# Altium PCB frm-mw-diode-detector.PcbDoc
Units mm, origin at the board's own origin, x right, y up, seen from the top; angles counter-clockwise.
Board outline 28 x 38 mm, 2 copper layers (Top Layer, Bottom Layer), stack 1.569 mm thick; 30 components, 17 nets, 94 pads, 84 vias.
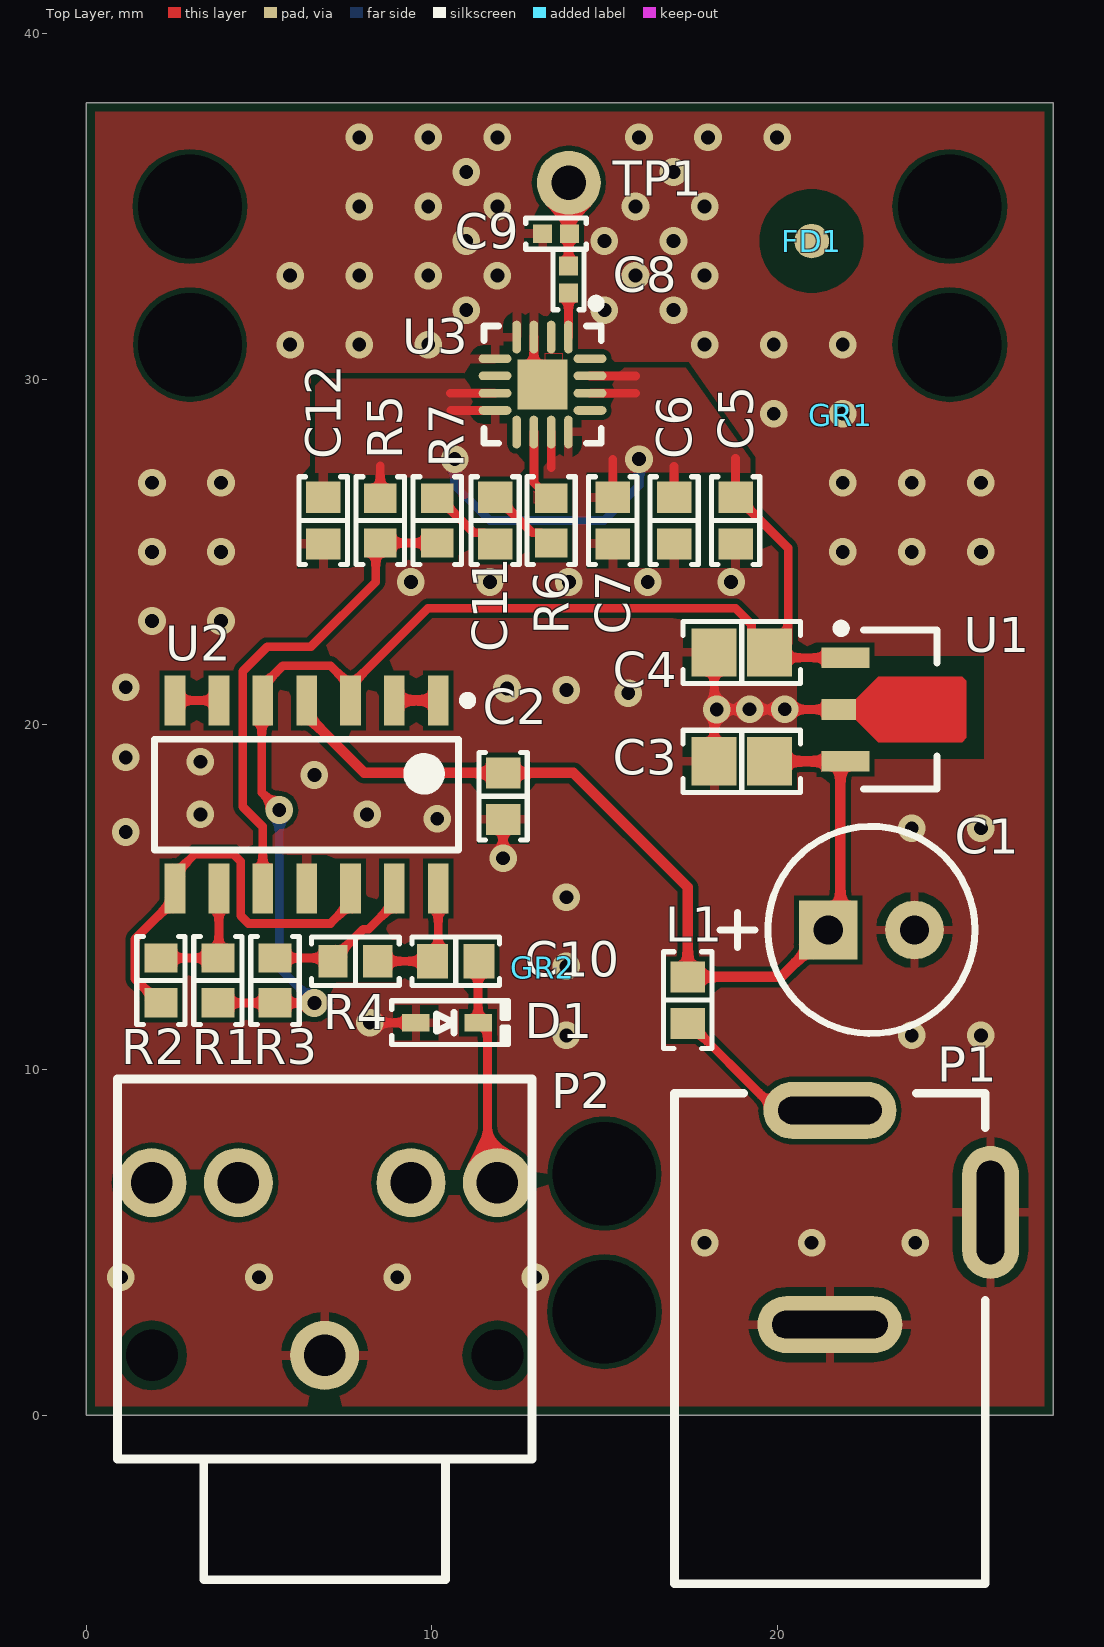
[diagram p0: Top Layer view]
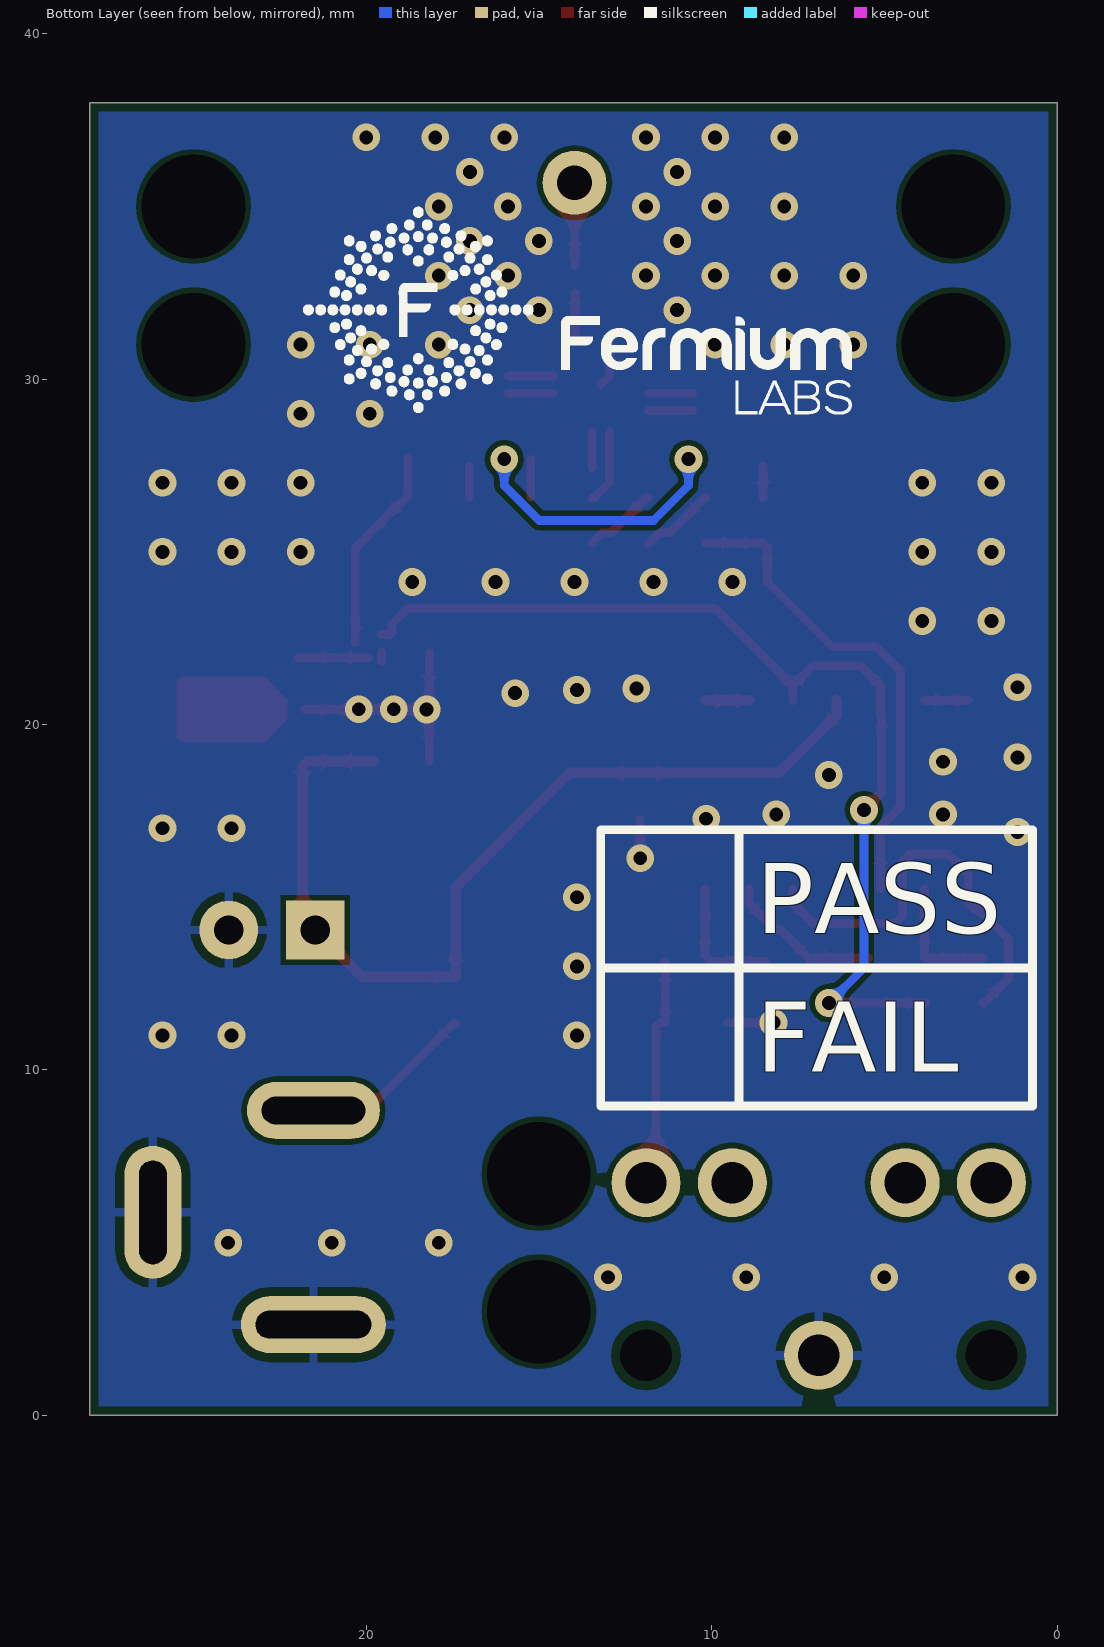
[diagram p1: Bottom Layer view, seen from below]
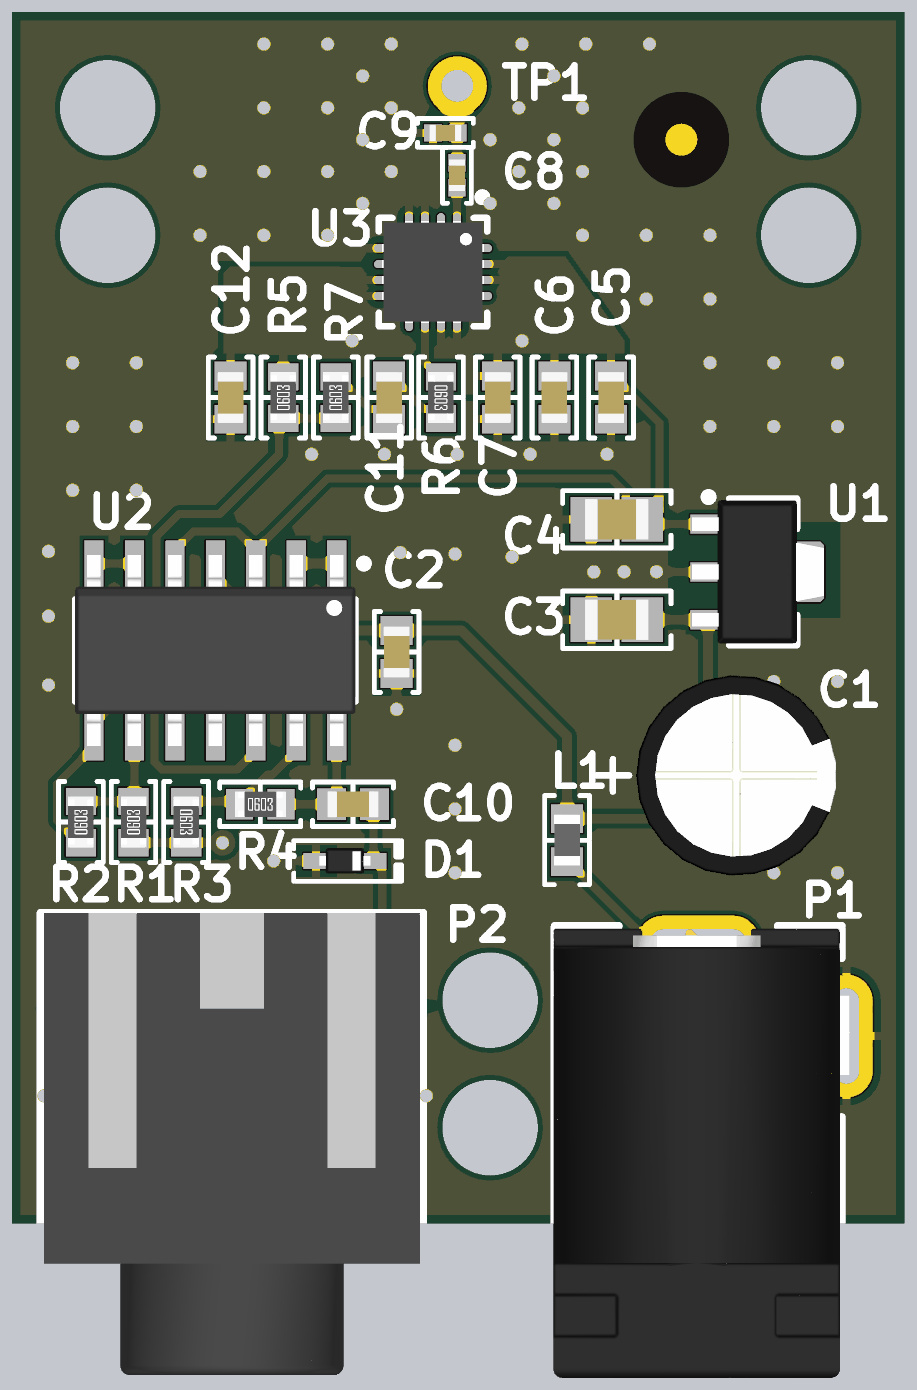
[diagram p2: 3D render of the assembled board from above, using the file's embedded part models]

## Layer stack, top to bottom
Top Solder: solder mask 0.0254, SM-001, Dk 4
Top Layer: signal copper 0.035
Dielectric 1: core 1.4986, Core-043, Dk 4.3
Bottom Layer: signal copper 0.035
Bottom Solder: solder mask 0.0254, SM-001, Dk 4

## Board outline
0,0 28,0 28,38 0,38

## Design rules (kind name [scope] priority, off if disabled: settings)
BoardOutlineClearance [All] p1: gap=0.254 ignorepadtopadclearanceinfootprint=FALSE
Clearance [All] p1: gap=0.152 ignorepadtopadclearanceinfootprint=TRUE
FanoutControl Fanout_LCC [All] p1 off: bgadir=Out bgaviamode=Centered fanoutstyle=Auto fanoutdirection=Alternating viagrid=0.025 // Protel DXP Scope 1 Expression Was: IsLCC   Fanout_LCC (Default Rule)
FanoutControl Fanout_BGA [All] p2 off: bgadir=Out bgaviamode=Centered fanoutstyle=Auto fanoutdirection=Alternating viagrid=0.025 // Protel DXP Scope 1 Expression Was: IsBGA   Fanout_BGA (Default Rule)
FanoutControl Fanout_SOIC [All] p3 off: bgadir=Out bgaviamode=Centered fanoutstyle=Auto fanoutdirection=Alternating viagrid=0.025 // Protel DXP Scope 1 Expression Was: IsSOIC   Fanout_SOIC (Default Rule)
FanoutControl Fanout_Default [All] p4: bgadir=Out bgaviamode=Centered fanoutstyle=Auto fanoutdirection=Alternating viagrid=0.025 // Fanout_Default (Default Rule)
FanoutControl Fanout_Small [All] p5 off: bgadir=Out bgaviamode=Centered fanoutstyle=Auto fanoutdirection=Alternating viagrid=0.025 // Protel DXP Scope 1 Expression Was: (CompPinCount < 5)   Fanout_Small (Default Rule)
HoleSize [All] p1: absolutevalues=TRUE maxlimit=6.3 minlimit=0.3 maxpercent=80.000 minpercent=20.000
HoleToHoleClearance HoleToHoleClearanceVia [IsVia vs IsVia] p1: gap=0.203 allowstackedmicrovias=TRUE
HoleToHoleClearance [not IsVia vs not IsVia] p2: gap=0.254 allowstackedmicrovias=TRUE
MinimumAnnularRing [All] p1: minimumring=0.152
MinimumSolderMaskSliver [All] p1 off: minsoldermaskwidth=0.203
PolygonConnect [All] p1: thpad.connectstyle=Relief thpad.reliefconductorwidth=0.254 thpad.reliefentries=4 thpad.polygonreliefangle="90 Angle" thpad.airgapwidth=0.254 smdpad.connectstyle=Relief smdpad.reliefconductorwidth=0.254 smdpad.reliefentries=4 smdpad.polygonreliefangle="90 Angle" smdpad.airgapwidth=0.254 via.connectstyle=Direct via.reliefconductorwidth=0.254 via.reliefentries=4 via.polygonreliefangle="90 Angle" via.airgapwidth=0.254
RoutingVias [All] p1: holewidth=0.4 width=0.8 viastyle="Through Hole" minholewidth=0.35 minwidth=0.7 maxholewidth=1 maxwidth=1.27
SilkToSilkClearance [All] p1: silktosilkclearance=0.2
SilkToSolderMaskClearance [All] p1 off: minsilkscreentomaskgap=0.254 clearancetoexposedcopper=TRUE // Protel DXP Scope 1 Expression Was: IsPad
SolderMaskExpansion [All] p1: expansion=0.051
UnRoutedNet [All] p1: checkbadconnections=TRUE
Width [All] p1: maxlimit=5.08 minlimit=0.152 preferedwidth=0.203
19 further rules are at their usual default settings.

## Components (designator, comment, footprint, x,y, rotation, side; value= is the part's Value field where it differs from the comment)
C1 "220uF" 3924B366-8672-45E9-B0BE-62DACC24E783 21.479,14.054 r0 top
C2 "100nF" "CAP 0603_1608" 12.066,17.925 r90 top
C3 "10uF" "CAP 0805_2012" 18.978,18.937 r0 top
C4 "10uF" "CAP 0805_2012" 18.978,22.088 r0 top
C5 "10pF" "CAP 0603_1608" 18.796,25.908 r270 top
C6 "100pF" "CAP 0603_1608" 17.018,25.908 r270 top
C7 "1nF" "CAP 0603_1608" 15.24,25.908 r270 top
C8 "0.1pF" "CAP 0402_1005 RF" 13.96,32.883 r270 top
C9 "0.1pF" "CAP 0402_1005 RF" 13.598,34.214 r0 top
C10 "100nF" "CAP 0603_1608" 10.696,13.148 r0 top
C11 "100nF" "CAP 0603_1608" 11.833,25.908 r270 top
C12 "100pF" "CAP 0603_1608" 6.858,25.908 r270 top
D1 "3.3V" SOD523F 10.442,11.37 r0 top
FD1 "IPC-7351A FIDUCIAL" FIDUCIAL-IPC-7351A 21,34 r0 top
GR1 "FermiumLABS logo" 5394DE47-A0E8-4329-8464-7791B7C19310 21.844,28.956 r180 top
GR2 "PASS-FAIL" 0B1556B7-A534-4801-B57D-01EFA34B1205 13.208,12.954 r180 top
L1 "BLM18BD252SN1D" "FER 0603_1608" 17.415,12.022 r90 top
P1 "DC-005A-20A" F0972D8A-C5C0-4A84-836D-A9666EE65C2D 21.529,8.827 r90 top
P2 "PJ-3900-04" 7EF2B92C-0FC9-4C85-B662-5CEC65BFCCC4 6.9,1.738 r90 top
R1 "4.7K" "RES 0603_1608" 3.811,12.591 r90 top
R2 "100K" "RES 0603_1608" 2.16,12.591 r90 top
R3 "4.7K" "RES 0603_1608" 5.462,12.591 r270 top
R4 "100K" "RES 0603_1608" 7.79,13.148 r0 top
R5 "100K" "RES 0603_1608" 8.509,25.908 r90 top
R6 "100" "RES 0603_1608" 13.458,25.908 r270 top
R7 "10K" "RES 0603_1608" 10.16,25.908 r90 top
TP1 "Header 1p 2.54x15mm" 2C1CB748-2B7B-4AED-959C-BA5F218FC650 14.97,40.687 r0 top
U1 "AS78L05RTR-E1" E733EFB9-FE91-4AE9-9197-29251971C3DC 23.804,20.437 r0 top
U2 "LM324DT" 34355DA5-B1DA-47C2-A88A-ECF82120A4F7 6.378,17.974 r270 top
U3 "LTC5564HUD" 1C9CA8C2-7F7E-4E2B-A488-6DD37E6BADEA 13.208,29.845 r270 top

## Footprints (in the part's own frame and the unit in brackets; to place one, negate y for a bottom-side part, rotate by r counter-clockwise, add the part's x,y. Pads: shape width x height; smd on the part's side, far side on the other; paste and mask are expansions set on the pad)
0B1556B7-A534-4801-B57D-01EFA34B1205 [mm]
1C9CA8C2-7F7E-4E2B-A488-6DD37E6BADEA [mm] "QFN, 16-Leads, Body 3.00x3.00mm, Pitch 0.50mm, Thermal Pad 1.45x1.45mm, IPC Medium Density"
  oval 0.95x0.25 smd: 1(-1.375,0.75) 2(-1.375,0.25) 3(-1.375,-0.25) 4(-1.375,-0.75) 9(1.375,-0.75) 10(1.375,-0.25) 11(1.375,0.25) 12(1.375,0.75)
  oval 0.25x0.95 smd: 5(-0.75,-1.375) 6(-0.25,-1.375) 7(0.25,-1.375) 8(0.75,-1.375) 13(0.75,1.375) 14(0.25,1.375) 15(-0.25,1.375) 16(-0.75,1.375)
  rect 1.45x1.45 smd: 17(0,0)
  silkscreen extent -2.47,-1.7 1.7,1.7, body extent -1.6,-1.6 1.6,1.6, height 0.8
2C1CB748-2B7B-4AED-959C-BA5F218FC650 [mm]
  round 1.85 hole 1: 1(-1,-5)
7EF2B92C-0FC9-4C85-B662-5CEC65BFCCC4 [mm]
  round 0 hole 1.5 unplated: 1(0,5) 1(0,-5)
  round 2 hole 1.2: 1(0,0) 2(5,5) 3(5,-5) 4(5,2.5) 5(5,-2.5)
  silkscreen extent -6.5,-6 8,6, body extent -6.5,-5.9 8,5.9, height 10
3924B366-8672-45E9-B0BE-62DACC24E783 [mm]
  rect 1.7x1.7 hole 0.85: 1(0,0)
  round 1.7 hole 0.85: 2(2.5,0)
  silkscreen extent -3.13,-3 4.25,3, body extent -1.9,-3.15 4.4,3.15, height 11
5394DE47-A0E8-4329-8464-7791B7C19310 [mm]
34355DA5-B1DA-47C2-A88A-ECF82120A4F7 [mm] "SOIC, 14-Leads, Body 8.65x3.90mm, Pitch 1.27mm, IPC Medium Density"
  rect 1.45x0.6 smd: 1(-2.725,3.81) 2(-2.725,2.54) 3(-2.725,1.27) 4(-2.725,0) 5(-2.725,-1.27) 6(-2.725,-2.54) 7(-2.725,-3.81) 8(2.725,-3.81) 9(2.725,-2.54) 10(2.725,-1.27) 11(2.725,0) 12(2.725,1.27) 13(2.725,2.54) 14(2.725,3.81)
  silkscreen extent -2.85,-4.4 1.6,4.79, body extent -3,-4.4 3,4.4, height 1.75
"CAP 0402_1005 RF" [mm] "Chip Capacitor, 2-Leads, Body 1.02x0.51mm, IPC High Density"
  rect 0.55x0.54 smd: 1(-0.39,0) 2(0.39,0)
  silkscreen extent -0.87,-0.45 0.87,0.45, body extent -0.5,-0.26 0.5,0.26, height 0.52
"CAP 0603_1608" [mm] "Chip Capacitor, 2-Leads, Body 1.60x0.80mm, IPC Medium Density"
  rect 0.9x1 smd: 1(-0.675,0) 2(0.675,0)
  silkscreen extent -1.27,-0.7 1.27,0.7, body extent -0.8,-0.41 0.8,0.41, height 0.82
"CAP 0805_2012" [mm] "Chip Capacitor, 2-Leads, Body 2.00x1.20mm, IPC Medium Density"
  rect 1.3x1.4 smd: 1(-0.8,0) 2(0.8,0)
  silkscreen extent -1.7,-0.9 1.7,0.9, body extent -1,-0.64 1,0.64, height 1.26
E733EFB9-FE91-4AE9-9197-29251971C3DC [mm]
  rect 1.4x0.6 smd: 1(-1.823,1.5) 3(-1.823,-1.5)
  rect 1x0.6 smd: 2(-2.023,0)
  Top Layer region: -1.523,0.3 -0.873,0.95 1.552,0.95 1.678,0.825 1.678,-0.825 1.552,-0.95 -0.873,-0.95 -1.523,-0.3
  silkscreen extent -2.07,-2.3 0.83,2.47, body extent -2.47,-2.25 1.68,2.25, height 1.5
F0972D8A-C5C0-4A84-836D-A9666EE65C2D [mm]
  oval 1.65x3.85 hole 0.8 slot 3 at 90 deg: 1(0,0)
  oval 1.65x4.2 hole 0.8 slot 3.35 at 90 deg: 2(-6.2,0)
  oval 3.85x1.65 hole 0.8 slot 3 at 0 deg: 3(-2.95,-4.65)
  silkscreen extent -13.7,-4.5 0.5,4.5, body extent -13.67,-4.75 0.43,4.55, height 10.9
"FER 0603_1608" [mm] "Chip Ferrite, 2-Leads, Body 1.60x0.80mm, IPC Medium Density"
  rect 0.9x1 smd: 1(-0.675,0) 2(0.675,0)
  silkscreen extent -1.4,-0.7 1.4,0.7, body extent -0.8,-0.41 0.8,0.41, height 0.82
FIDUCIAL-IPC-7351A [mm]
  round 1 smd paste-2.54 mask+1: 5(0,0)
  Top Layer pour cut-out: 0,-1.5 -0.574,-1.386 -1.061,-1.061 -1.386,-0.574 -1.5,0 -1.5,0 -1.386,0.574 -1.061,1.061 -0.574,1.386 0,1.5 0,1.5 0.574,1.386 1.061,1.061 1.386,0.574 1.5,0 1.5,0 1.386,-0.574 1.061,-1.061 0.574,-1.386 0,-1.5
"RES 0603_1608" [mm] "Chip Resistor, 2-Leads, Body 1.60x0.80mm, IPC Medium Density"
  rect 0.85x0.95 smd: 1(-0.65,0) 2(0.65,0)
  silkscreen extent -1.27,-0.7 1.27,0.7, body extent -0.8,-0.4 0.8,0.4, height 0.45
SOD523F [mm] "SODFL, 2-Leads, Body 0.80x1.60mm, IPC Medium Density"
  rect 0.8x0.5 smd: 1(0.9,0) 2(-0.9,0)
  silkscreen extent -1.6,-0.64 1.8,0.64, body extent -0.8,-0.4 0.8,0.4, height 0.65

## Part data
C1: library part 1a28df19-6d3e-4a71-836c-f22920f8e8ab, "CAP  THT ELEC 220uF 25V 20%", Manufacturer 1=Rubycon, Manufacturer Part Number 1=25PK220MEFC-6.3*11, ComponentLink1Description=Datasheet, ComponentLink1URL="http://localhost:8080/static/files/Rubycon-220uF-25V_C109337_12019-03-10_214953.757848.pdf?Rubycon-220uF-25V_C109337 (1).pdf", id=14782, Part Number=1a28df19-6d3e-4a71-836c-f22920f8e8ab
C2 C10 C11: library part 02841f84-ac15-41b5-9e17-915f8f067828, "CAP SMD MLCC 100nF 25V 0603 X7R", Manufacturer 1="Samsung Electro-Mechanics", Manufacturer Part Number 1=CL10B104KA8NNNC, ComponentLink1Description=Datasheet, ComponentLink1URL=http://localhost:8080/static/files/Samsung-Electro-Mechanics-CL10B104KA8NNNC_C15902019-03-10_215548.826887.pdf?Samsung-Electro-Mechanics-CL10B104KA8NNNC_C1590.pdf, id=14784, Part Number=02841f84-ac15-41b5-9e17-915f8f067828
C3 C4: library part 1ffbe5a9-0884-4740-bdad-20a6a98400e6, "CAP SMD MLCC 10uF 25V 0805 X5R", Manufacturer 1="Samsung Electro-Mechanics", Manufacturer 2=Murata, Manufacturer Part Number 1=CL21A106KAYNNNE, Manufacturer Part Number 2=GRM21BR61E106KA73L, ComponentLink1Description=Datasheet, ComponentLink1URL=http://localhost:8080/static/files/Samsung-Electro-Mechanics-CL21A106KAYNNNE_C158502019-03-10_213827.610739.pdf?Samsung-Electro-Mechanics-CL21A106KAYNNNE_C15850.pdf, id=14779, Part Number=1ffbe5a9-0884-4740-bdad-20a6a98400e6
C5: library part b659b677-71ac-4e84-9ac8-47a475f18d31, "CAP SMD MLCC 10pF 50V 0603 C0G/NP0", Manufacturer 1=Yageo, Manufacturer Part Number 1=CC0603GRNPO9BN100, id=14805, Part Number=b659b677-71ac-4e84-9ac8-47a475f18d31
C6 C12: library part ccf679fd-1b09-4431-be81-04c3ce295510, "CAP SMD MLCC 100pF 100V 0603 C0G/NP0", Manufacturer 1=Yageo, Manufacturer Part Number 1=CC0603JRNPO0BN101, id=14804, Part Number=ccf679fd-1b09-4431-be81-04c3ce295510
C7: library part 0eca2548-3630-4fea-a3d5-94248c1cae74, "CAP SMD MLCC 1nF 50V 0603 X7R", Manufacturer 1="Samsung Electro-Mechanics", Manufacturer Part Number 1=CL10B102KB8NNNC, ComponentLink1Description=Datasheet, ComponentLink1URL="http://localhost:8080/static/files/Samsung-Electro-Mechanics-CL10B102KB8NNNC_C1588_12019-03-10_215732.131818.pdf?Samsung-Electro-Mechanics-CL10B102KB8NNNC_C1588 (1).pdf", id=14785, Part Number=0eca2548-3630-4fea-a3d5-94248c1cae74
C8 C9: library part 26a1b8a5-3146-4e38-b8a1-20cf4d8b229c, "CAP SMD MLCC 0.1pF 50V 0402 HIGH-Q", Manufacturer 1=Murata, Manufacturer Part Number 1=GJM1555C1HR10BB01D, id=14808, Part Number=26a1b8a5-3146-4e38-b8a1-20cf4d8b229c
D1: library part d6266fd0-7428-4fb9-a062-338cdce926fd, "DIODE SMD TVS 3.3V BIDIRECTIONAL SOD-523", Manufacturer 1="Born Semiconductor", Manufacturer Part Number 1=PESD3V3S1BA-N, ComponentLink1Description=Datasheet, ComponentLink1URL=http://localhost:8080/static/files/Bourne-Semicon-Shenzhen-PESD3V3S1BA-N_C3160372019-04-07_002431.794112.pdf?Bourne-Semicon-Shenzhen-PESD3V3S1BA-N_C316037.pdf, id=14798, Part Number=d6266fd0-7428-4fb9-a062-338cdce926fd
FD1: library part 19da4612-eb95-43bb-9984-553a52b2a224, "GRAPHICS FIDUCIAL IPC-7351A", id=14800, Part Number=19da4612-eb95-43bb-9984-553a52b2a224
GR1: library part 50f8ea88-0034-49fe-a263-d8e97bc35e2f, "GRAPHICS LOGO FERMIUM LABS SRL", id=14799, Part Number=50f8ea88-0034-49fe-a263-d8e97bc35e2f
GR2: library part d1abe19f-3fed-4f20-b2ed-afc0ffbc6628, "GRAPHICS PASS-FAIL MARK", id=14801, Part Number=d1abe19f-3fed-4f20-b2ed-afc0ffbc6628
L1: library part c9e30ae8-9d5b-4135-a079-b1147da846d8, "FER SMD CHIP 0603 400mA 1k@100MHz 500mOhm", Manufacturer 1=Murata, ComponentLink1Description=Datasheet, ComponentLink1URL=http://localhost:8080/static/files/Murata-Electronics-BLM18AG102SN1D_C858242019-03-10_220021.186607.pdf?Murata-Electronics-BLM18AG102SN1D_C85824.pdf, id=14786, Manufacturer Part Number 1=BLM18BD252SN1D, Part Number=c9e30ae8-9d5b-4135-a079-b1147da846d8
P1: library part b53db51a-1725-412b-9039-fa7a45c7c438, "CONN THT DC JACK 0.5A 30VDC 5Kcycles", Manufacturer 1="HRO Electronics", ComponentLink1Description=Datasheet, ComponentLink1URL="http://localhost:8080/static/files/Korean-Hroparts-Elec-DC-005A-20A_C191049_22019-03-10_214231.486078.pdf?Korean-Hroparts-Elec-DC-005A-20A_C191049 (2).pdf", id=14780, Manufacturer Part Number 1=DC-005A-20A, Part Number=b53db51a-1725-412b-9039-fa7a45c7c438
P2: library part 80507a24-5d7c-4cf5-953e-f54832d54564, "CONN THT 3.5mm AUDIO STEREO AUX SWITCH", Manufacturer 1="HRO Electronics", ComponentLink1Description=Datasheet, ComponentLink1URL=http://localhost:8080/static/files/Korean-Hroparts-Elec-PJ-3900-04_C1518392019-04-10_231144.687617.pdf?Korean-Hroparts-Elec-PJ-3900-04_C151839.pdf, id=14793, Manufacturer Part Number 1=PJ-3900-04, Part Number=80507a24-5d7c-4cf5-953e-f54832d54564
R1 R3: library part 86e7c7d8-c04a-4e9a-bdc1-b1b3729c93a3, "RES SMD 4.7K OHM 1% 1/10W 0603", Manufacturer 1=Yageo, Manufacturer Part Number 1=RC0603FR-074K7L, id=12445, Part Number=86e7c7d8-c04a-4e9a-bdc1-b1b3729c93a3
R2 R4 R5: library part 76af10b3-9d85-4b5c-a2d6-26cc74f432f7, "RES SMD 100K OHM 1% 1/10W 0603", Manufacturer 1=Yageo, Manufacturer Part Number 1=RC0603FR-07100KL, id=12746, Part Number=76af10b3-9d85-4b5c-a2d6-26cc74f432f7
R6: library part 0a6c4b74-f837-4563-b154-6e196d753525, "RES SMD 100 OHM 1% 1/10W 0603", Manufacturer 1=Yageo, Manufacturer Part Number 1=RC0603FR-07100RL, id=12301, Part Number=0a6c4b74-f837-4563-b154-6e196d753525
R7: library part 93242766-ba1d-462d-b58f-ce1dfc4129c8, "RES SMD 10K OHM 1% 1/10W 0603", Manufacturer 1=Yageo, Manufacturer Part Number 1=RC0603FR-0710KL, id=12101, Part Number=93242766-ba1d-462d-b58f-ce1dfc4129c8
TP1: library part 6533a5d9-7dc1-4b74-ad41-7af9be51a6b8, "CONN THT PIN HEADER 1P MALE 2.54mm 15mm HEIGHT", Manufacturer 1="Boom Precision Elec", Manufacturer Part Number 1=---, id=14825, Part Number=6533a5d9-7dc1-4b74-ad41-7af9be51a6b8
U1: library part fd64863e-487f-4688-b264-696c0ba5456b, "IC SMD LINEAR VOLTAGE REGULATOR 5V 100mA SOT-89", Manufacturer 1="Diodes Inc.", Manufacturer 2="KIA Semicon Tech", Manufacturer Part Number 2=KIA78L05T, ComponentLink1Description=Datasheet, ComponentLink1URL="http://localhost:8080/static/files/Diodes-Incorporated-AS78L05RTR-E1_C90471_12019-03-10_215252.941962.pdf?Diodes-Incorporated-AS78L05RTR-E1_C90471 (1).pdf", ComponentLink2Description=Datasheet, ComponentLink2URL="http://localhost:8080/static/files/KIA-Semicon-Tech-KIA78L05T_C90763_12019-03-10_215415.523371.pdf?KIA-Semicon-Tech-KIA78L05T_C90763 (1).pdf", id=14783, Manufacturer Part Number 1=AS78L05RTR-E1, Part Number=fd64863e-487f-4688-b264-696c0ba5456b
U2: library part 21a85167-c328-42f7-a52e-365842c6dad3, "IC SMD OPAMP LM324DT SO-14", Manufacturer 1="ST Microelectronics", ComponentLink1Description=Datasheet, ComponentLink1URL=http://localhost:8080/static/files/STMicroelectronics-LM324DT_C710352019-04-06_191500.254110.pdf?STMicroelectronics-LM324DT_C71035.pdf, id=14792, Manufacturer Part Number 1=LM324DT, Part Number=21a85167-c328-42f7-a52e-365842c6dad3
U3: library part 45536c7f-5716-49d5-adce-f87923efcc45, "IC SMD RF POWER DETECTOR 15GHz LTC5564 QFN-16", Manufacturer 1="Analog Devices / Linear Technology", Manufacturer Part Number 2=LTC5564IUD, ComponentLink1Description=Datasheet, ComponentLink1URL=http://localhost:8080/static/files/5564fc2019-04-28_163050.562654.pdf?5564fc.pdf, id=14803, Manufacturer 2="Analog Devices / Linear Technology", Manufacturer Part Number 1=LTC5564HUD, Part Number=45536c7f-5716-49d5-adce-f87923efcc45

## Free pads (board coordinates)
  round 0 hole 3 unplated: 2(3,31) 2(3,35) 2(15,3) 2(15,7) 2(25,31) 2(25,35)

## Via types
v1: diameter 0.8, hole 0.4, Top Layer to Bottom Layer, tented both sides, 84 vias

## Nets (pads, with @x,y where several pads share a name; then routed paths per layer and width w, separated by ;. In a path a pad name is that pad's centre, name@x,y a point inside that pad or via, vN(x,y) a via of type N, cw(c..) or ccw(c..) an arc to the next point about the centre after c; other vN are vias at no path point)
+5V: C4.2 C5.1 C6.1 C7.1 C12.1 R1.1 R3.2 R5.2 U1.1 U2.3 U2.5 U3.7 U3.8 U3.11 U3.12 U3.14 U3.15 | length 54.6
  Top Layer w0.254: R1.1 R3.2 6.601,11.941 v1(6.604,11.938) ; v1(5.588,17.526) 5.08,18.034 5.08,20.246 5.108,20.274 U2.5 5.108,21.124 5.687,21.703 7.069,21.703 U2.3@7.648,21.124 ; U2.3 U2.3@7.648,21.124 ; R5.2 8.509,27.491 ; 10.545,29.595 U3.7 ; 10.553,29.095 U3.8 ; 13.458,27.436 U3.11 ; U3.14 15.905,29.595 ; U3.15 15.905,30.095 ; C7.1 15.24,27.677 ; C6.1 17.018,27.482 ; 18.796,27.704 C5.1 18.846,26.583 19.558,25.871 ; C4.2@19.558,21.844 C4.2@19.558,22.088 ; C4.2@19.558,22.606 19.31,22.606 19.255,22.661 19.255,22.909 18.796,23.368 9.892,23.368 U2.3@7.648,21.124 ; 19.575,25.799 19.558,25.816 19.558,25.871 ; C4.2@19.929,21.937 U1.1 ; C4.2@20.32,22.352 20.32,25.109 19.558,25.871
  Bottom Layer w0.254: v1(5.588,17.526) 5.588,12.954 v1(6.604,11.938) ; v1(10.668,27.686) 10.668,26.924 11.684,25.908 14.986,25.908 16.002,26.924 v1(16.002,27.686)
+12V: C1.1 C2.2 C3.2 L1.2 U1.3 U2.4 | length 27.7
  Top Layer w0.305: U2.4 6.378,20.274 8.052,18.6 C2.2 14.102,18.6 17.415,15.287 L1.2 20.122,12.697 C1.1 21.833,14.409 21.833,18.789 21.686,18.937 C3.2
ANTENNA: C8.1 C9.2 TP1.1 | length 2.4
  Top Layer w0.254: C8.1 13.965,33.278 13.965,35.682 TP1.1
GND: C1.2 C2.1 C3.1 C4.1 C5.2 C6.2 C7.2 C9.1 C12.2 D1.2 P1.2 P1.3 P2.1 U1.2 U2.11 U3.3 U3.4 U3.5 U3.17 | length 10.7
  Top Layer w0.254: v1(8.207,11.37) D1.2 ; v1(12.066,16.128) C2.1 ; U3.3 12.958,30.095 U3.17 ; C3.1 v1@18.178,20.513 ; C4.1 v1@18.178,20.513 ; U1.2 v1(18.253,20.437) v1@18.178,20.513
  other v1: 1,4 5,4 9,4 13,4 17.9,5 21,5 24,5 13.9,11 23.9,11 25.9,11 13.9,13 13.9,15 1.143,16.891 23.9,17 25.9,17 10.16,17.272 3.302,17.399 8.128,17.399 6.604,18.542 3.302,18.923 1.143,19.05 19.203,20.444 20.219,20.444 15.691,20.91 13.9,21 12.179,21.045 1.143,21.082 1.9,23 3.9,23 9.398,24.13 11.684,24.13 13.97,24.13 16.256,24.13 18.669,24.13 1.9,25 3.9,25 21.9,25 23.9,25 25.9,25 1.9,27 3.9,27 21.9,27 23.9,27 25.9,27 19.9,29 21.9,29 5.9,31 7.9,31 9.9,31 17.9,31 19.9,31 21.9,31 11,32 15,32 17,32 5.9,33 7.9,33 9.9,33 11.9,33 15.9,33 17.9,33 11,34 15,34 17,34 7.9,35 9.9,35 11.9,35 15.9,35 17.9,35 11,36 17,36 7.9,37 9.9,37 11.9,37 16,37 18,37 20,37
NetC8_2: C8.2 U3.1 | length 1.3
  Top Layer w0.254: U3.1 U3.1 C8.2 C8.2
NetC10_1: C10.1 R4.2 U2.14 | length 3.8
  Top Layer w0.254: R4.2 C10.1 10.188,13.315 U2.14
NetC10_2: C10.2 D1.1 P2.3 | length 6.7
  Top Layer w0.254: C10.2 11.342,13.119 D1.1 11.492,11.37 11.615,11.247 11.615,7.023 P2.3
NetC11_1: C11.1 R6.2 | length 2.2
  Top Layer w0.254: C11.1 11.883,26.583 12.91,25.556 13.16,25.556 R6.2
NetC11_2: C11.2 R7.2 | length 2.2
  Top Layer w0.254: R7.2 10.21,26.558 11.212,25.556 11.51,25.556 C11.2
NetL1_1: L1.1 P1.1 | length 5.2
  Top Layer w0.254: L1.1 17.465,11.347 19.717,9.094 21.262,9.094 P1.1
NetR1_2: R1.2 R2.2 U2.9 | length 3.7
  Top Layer w0.254: R2.2 R1.2 3.838,13.268 U2.9
NetR2_1: R2.1 U2.8 U2.12 | length 12.4
  Top Layer w0.254: R2.1 2.11,11.941 1.406,12.645 1.406,13.782 2.275,14.651 2.395,14.651 2.568,14.824 2.568,15.674 3.147,16.253 4.254,16.253 4.473,16.034 4.473,14.464 4.692,14.245 7.069,14.245 7.648,14.824 U2.12
NetR3_1: R3.1 R4.1 U2.13 | length 4.6
  Top Layer w0.254: R3.1 7.047,13.241 R4.1 7.14,13.198 8.016,14.073 8.167,14.073 8.918,14.824 U2.13
NetR5_1: R5.1 R7.1 U2.10 | length 14.3
  Top Layer w0.254: U2.10 5.108,17.045 4.529,17.625 4.529,21.54 5.239,22.25 6.502,22.25 8.382,24.13 8.382,25.131 R5.1 R7.1
NetR6_1: R6.1 U3.10 | length 2.1
  Top Layer w0.254: U3.10 12.958,27.008 13.408,26.558 R6.1
NetU2_1: U2.1 U2.2 | length 1.3
  Top Layer w0.305: U2.2 U2.1
NetU2_6: U2.6 U2.7 | length 1.3
  Top Layer w0.254: U2.7 U2.6
pads on no net: FD1.5 P2.2 P2.4 P2.5 U3.2 U3.6 U3.9 U3.13 U3.16

## Polygon pours and split planes (outlines as drawn)
GND on Top Layer "GND_L01_P029" (solid, remove dead copper, pour order 29): 0,31 6.5,31 6.5,25 0,25
+5V on Top Layer "+5V_L01_P028" (solid, remove dead copper, pour order 28): 12.954,26.416 13.299,26.416 12.954,26.761
+5V on Top Layer "+5V_L01_P027" (solid, remove dead copper, pour order 27): 13.278,30.734 13.282,30.202 13.798,30.202 13.798,30.734
+5V on Top Layer "+5V_L01_P025" (solid, remove dead copper, pour order 25): 6.627,26 9.925,26 20.774,26 17.549,30.509 14.329,30.509 14.329,30.49 6.627,30.508
GND on Top Layer "GND_L01_P024" (solid, remove dead copper, pour order 24): 0,30.202 15.035,30.167 14.963,38 0,38
GND on Top Layer "GND_L01_P023" (solid, remove dead copper, pour order 23): 13.211,38 13.28,30.5 13.798,30.5 17.446,30.5 19.383,27.744 19.383,25 28,25 28,38
GND on Top Layer "GND_L01_P022" (solid, remove dead copper, pour order 22): 0,0 0,25.798 28,25.798 28,0
GND on Bottom Layer "GND_L02_P026" (solid, remove dead copper, pour order 26): 0,38 28,38 28,0 0,0

## Other copper
Top Layer:
  pour cut-out: 20.066,39.116
  pour cut-out: 20.574,38.862 20.574,28.702
  pour cut-out: 26,22 20.574,22 20.574,19 26,19
  pour cut-out: 21.981,21.937
  region net GND: 11.786,32.08
  pour cut-out: 14.351,34.163
  pour cut-out: 13.537,34.219

## Silkscreen, mask and mechanical layers (free items; w line width, h text height)
Board Outline:
  the board outline again, w0.2
PCBM Notes:
  text "YOU CAN PLACE MARKING HERE" at 1.27,17.018 h0.76 r90

## Text inside footprints (layer, text, board x,y; h text height)
GR2: Bottom Overlay "FAIL" at 8.708,9.954 h2.03; Bottom Overlay "PASS" at 8.708,13.954 h2.03